# Altium PCB BRAINS.PcbDoc
Units mm, origin at the board's own origin, x right, y up, seen from the top; angles counter-clockwise.
Board outline 32.5 x 11 mm, 4 copper layers (Top Layer, Layer 1, Layer 2, Bottom Layer), stack 1.868 mm thick; 58 components, 45 nets, 199 pads, 134 vias.
Unrouted connection lines stored in the file: 7.
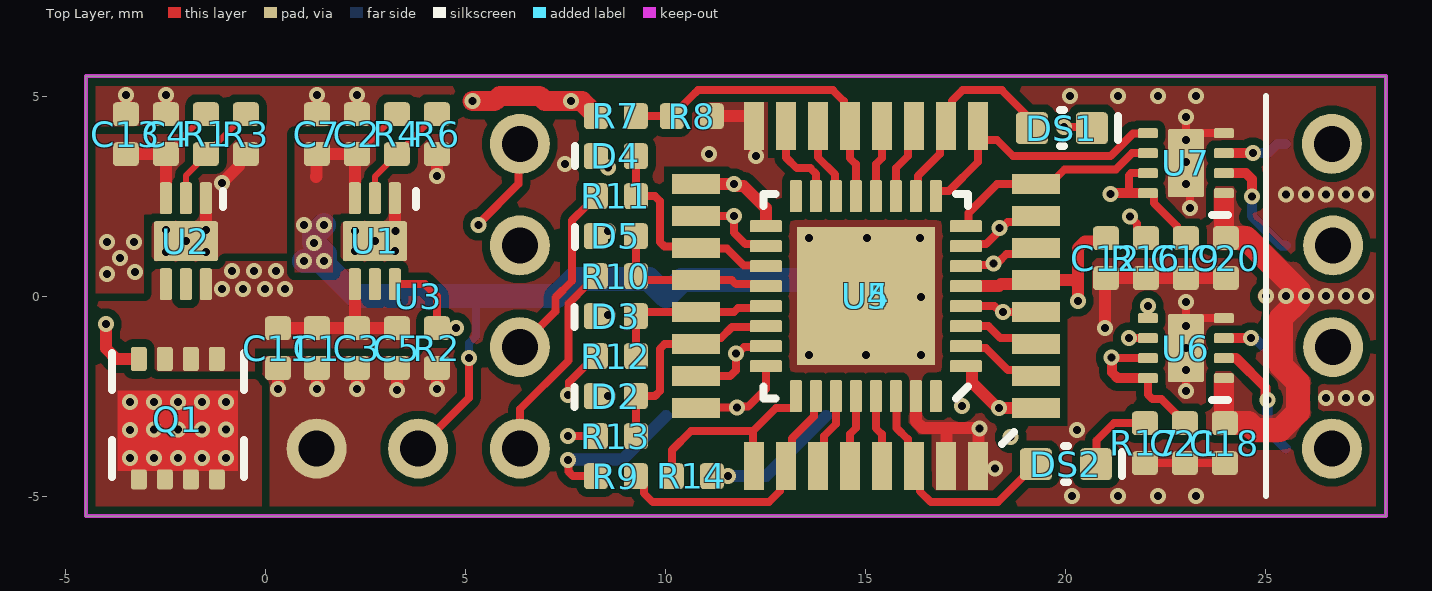
[diagram p0: Top Layer view]
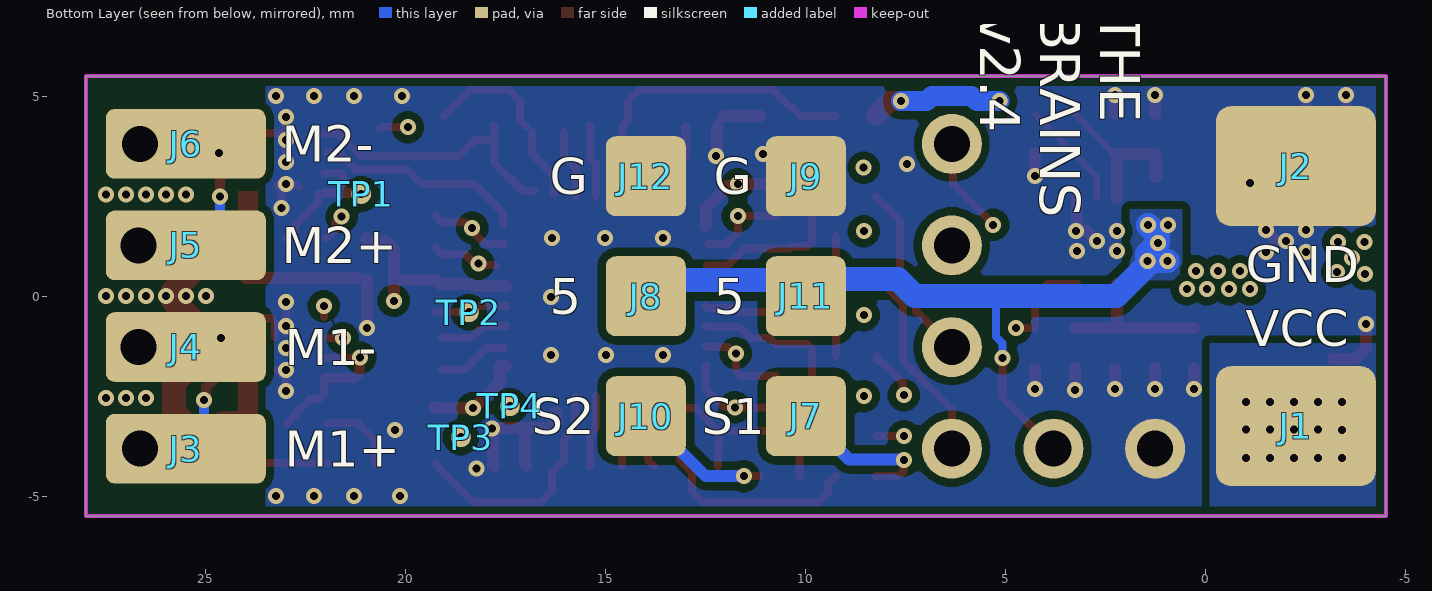
[diagram p1: Bottom Layer view, seen from below]
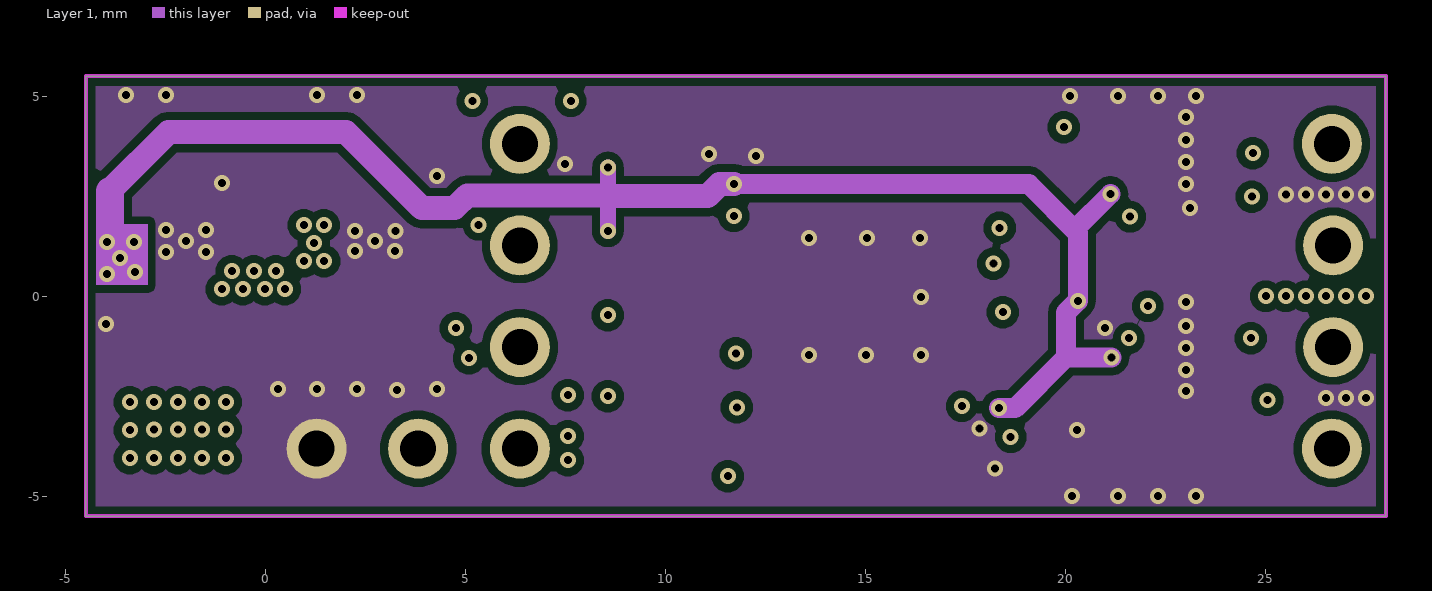
[diagram p2: Layer 1]
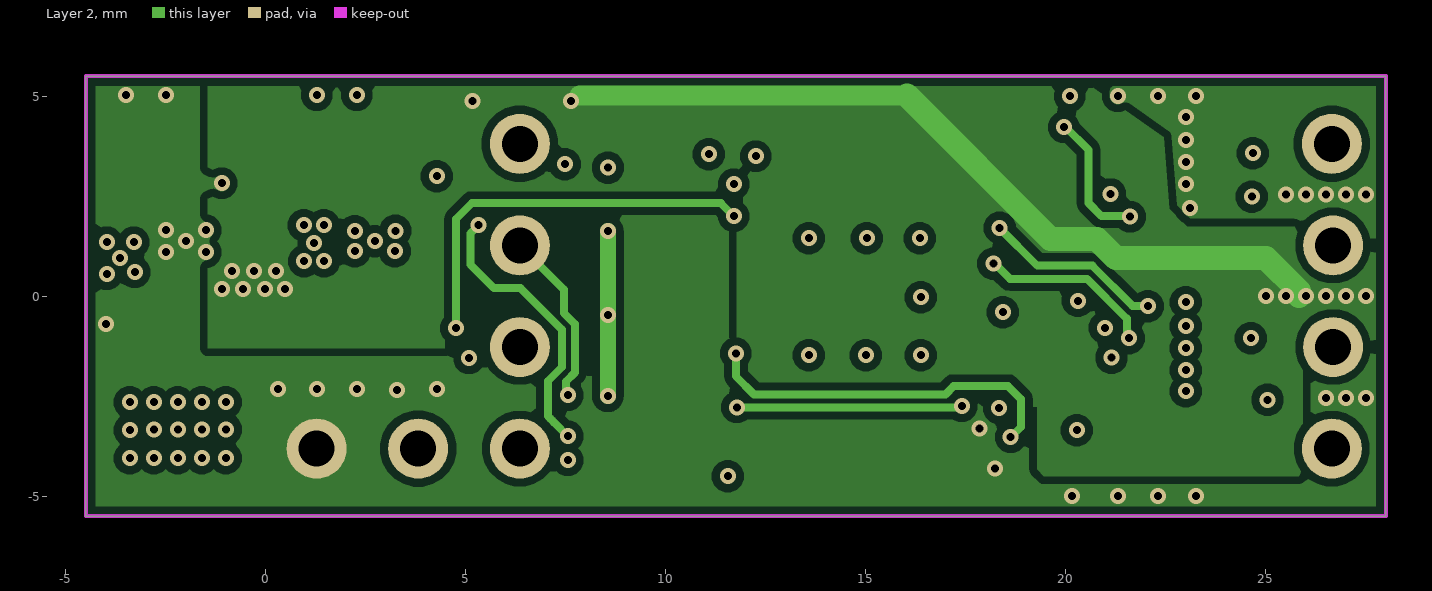
[diagram p3: Layer 2]
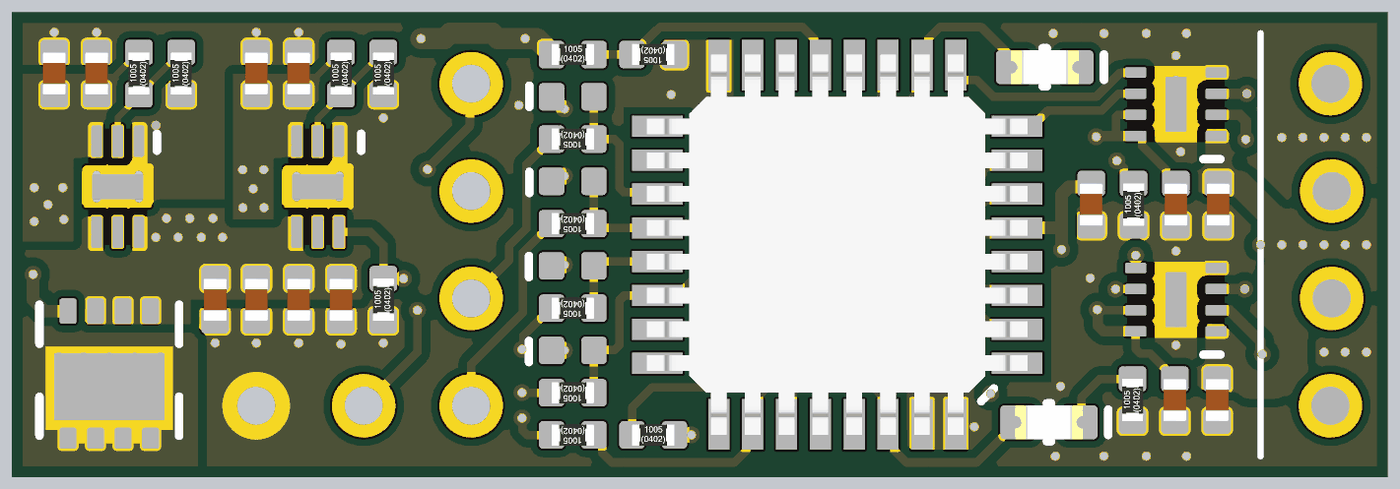
[diagram p4: 3D render of the assembled board from above, using the file's embedded part models]

## Layer stack, top to bottom
Top Solder: solder mask 0.0102, Solder Resist, Dk 3.5
Top Layer: signal copper 0.0356
Dielectric 1: core 0.1016, FR-4, Dk 4.5
Layer 1: signal copper 0.035
Dielectric1: core 1.524, FR-4, Dk 4.5
Layer 2: signal copper 0.035
Dielectric 2: core 0.1016, FR-4, Dk 4.5
Bottom Layer: signal copper 0.0356
Bottom Solder: solder mask 0.0102, Solder Resist, Dk 3.5

## Board outline
-4.5,-5.5 28,-5.5 28,5.5 -4.5,5.5

## Design rules (kind name [scope] priority, off if disabled: settings)
AcuteAngle [All] p1: minimum=6.00000000000000E+0001 checktracksonly=TRUE
AssemblyTestPointUsage [All] p1: valid=2
AssemblyTestpoint [All] p1: testpointundercomponent=FALSE minsize=1 maxsize=2.5 preferedsize=1.5 minholesize=0 maxholesize=1 preferedholesize=0.8 testpointgrid=0.1 usegrid=TRUE gridoriginx=100 gridoriginy=80 gridtolerance=0 allowsidebottom=TRUE minspacing=3
Clearance [All] p1: gap=0.199 ignorepadtopadclearanceinfootprint=FALSE except(0: Arc-Hole Track-Hole SMDPad-Hole THPad-Hole Via-Hole Fill-Hole Poly-Hole Region-Hole Text-Hole; 0.127: Arc-Arc Arc-Track Track-Track SMDPad-SMDPad; 0.15: Arc-Text Track-Text SMDPad-Text THPad-Text Via-Text Fill-Text Poly-Text Region-Text Text-Text)
ComponentClearance [All] p1: gap=0.25 collisioncheckmode=3 verticalgap=0.25 showdistances=TRUE
DiffPairsRouting [All] p1: maxlimit=10 minlimit=0.2 mostfreqgap=0.254 toplayer_prefgap=0.2 toplayer_minwidth=0.381 toplayer_maxwidth=0.381 toplayer_prefwidth=0.381 midlayer1_mingap=0.254 midlayer1_maxgap=0.254 midlayer1_minwidth=0.381 midlayer1_maxwidth=0.381 midlayer1_prefwidth=0.381 midlayer2_mingap=0.254 midlayer2_maxgap=0.254 midlayer2_minwidth=0.381 midlayer2_maxwidth=0.381 midlayer2_prefwidth=0.381 bottomlayer_prefgap=0.2 bottomlayer_minwidth=0.381 bottomlayer_maxwidth=0.381 bottomlayer_prefwidth=0.381 maxuncoupledlength=5
FabricationTestPointUsage TestPointUsage [All] p1: valid=0 allowmultiple=FALSE
FabricationTestpoint Testpoint [All] p1: side=1 testpointundercomponent=TRUE minsize=0.3 maxsize=10 preferedsize=1.5 minholesize=0 maxholesize=10 preferedholesize=0.8 testpointgrid=0.025 allowsidetop=TRUE usegrid=FALSE gridtolerance=0
Height [All] p1: minheight=0 maxheight=100 prefheight=5
HoleSize HoleSize_1 [All] p1: absolutevalues=TRUE maxlimit=6.3 minlimit=0.2 maxpercent=80.000 minpercent=20.000
HoleToHoleClearance [IsVia] p1: gap=0.254 allowstackedmicrovias=TRUE
HoleToHoleClearance HoleToHoleClearance_1 [All] p2: gap=0.5 allowstackedmicrovias=TRUE
MatchedLengths DiffPair_GTMatchedLengths [InDifferentialPair ('GT_RX0') Or InDifferentialPair ('GT_RX1') Or InDifferentialPair ('GT_TX2') Or InDifferentialPair ('GT_TX3') Or InDifferentialPair ('GT_TX1') Or InDifferentialPair ('GT_RX2') Or InDifferentialPair ('GT_TX0') Or InDifferentialPair ('GT_RX3')] p1: tolerance=0.127 checknetsindiffpair=TRUE checkdiffpairvsdiffpair=FALSE checkxsignals=FALSE checkothers=FALSE
MinimumAnnularRing [All] p1: minimumring=0.1
MinimumSolderMaskSliver [All] p1: minsoldermaskwidth=0.15
PlaneClearance [All] p1: clearance=0.3
PlaneConnect PlaneConnect_Via [isVia] p1: planeconnectstyle=Direct reliefexpansion=0.508 reliefentries=4 reliefconductorwidth=0.254 reliefairgap=0.254
PlaneConnect [All] p2: planeconnectstyle=Direct reliefexpansion=0.3 reliefentries=4 reliefconductorwidth=0.3 reliefairgap=0.2
PolygonConnect PolygonConnect_Via [isVia] p1: connectstyle=Direct reliefconductorwidth=0.254 reliefentries=4 polygonreliefangle="90 Angle" airgapwidth=0.254
PolygonConnect [All] p2: connectstyle=Direct reliefconductorwidth=0.3 reliefentries=4 polygonreliefangle="90 Angle" airgapwidth=0.254
RoutingLayers [All] p1: top layer_v5=TRUE mid layer 1_v5=FALSE mid layer 2_v5=FALSE bottom layer_v5=TRUE
RoutingVias [All] p1: holewidth=0.3 width=0.7 viastyle="Through Hole" minholewidth=0.2 minwidth=0.4 maxholewidth=0.3 maxwidth=0.7
SilkToSilkClearance [All] p1: silktosilkclearance=0.1
SilkToSolderMaskClearance SilkscreenOverComponentPads [IsPad] p1: minsilkscreentomaskgap=0.125 clearancetoexposedcopper=TRUE
SolderMaskExpansion SolderMaskExpansion_Via [isvia] p1: expansion=-10 istentingtop=FALSE
SolderMaskExpansion [All] p2: expansion=0.05 istentingtop=FALSE
Width [All] p1: maxlimit=100 minlimit=0.127 preferedwidth=0.15 minimp=50.000000 maximp=50.000000 favimp=50.000000
15 further rules are at their usual default settings.

## Components (designator, comment, footprint, x,y, rotation, side; value= is the part's Value field where it differs from the comment)
C1 "1uF,50V" CAPC1005X05N_0402 1.275,-1.3 r90 top
C2 "4.7uF,16V" CAPC1005X05N_0402 2.275,4.05 r270 top
C3 "1uF,50V" CAPC1005X05N_0402 2.275,-1.3 r90 top
C4 "4.7uF,16V" CAPC1005X05N_0402 -2.5,4.05 r270 top
C5 "100nF,50V" CAPC1005X05N_0402 3.275,-1.3 r90 top
C7 "100nF,50V" CAPC1005X05N_0402 1.275,4.05 r270 top
C11 "100nF,50V" CAPC1005X05N_0402 0.3,-1.3 r90 top
C12 "100nF,50V" CAPC1005X05N_0402 21,0.95 r90 top
C13 "100nF,50V" CAPC1005X05N_0402 -3.5,4.05 r270 top
C18 "100nF,50V" CAPC1005X05N_0402 23.975,-3.675 r90 top
C19 "100nF,50V" CAPC1005X05N_0402 23,0.95 r90 top
C20 "100nF,50V" CAPC1005X05N_0402 24,0.95 r90 top
C21 "100nF,50V" CAPC1005X05N_0402 22.975,-3.675 r90 top
D2 "SBR0240LPW" TVS0402 8.75,-2.5 r0 top
D3 "SBR0240LPW" TVS0402 8.75,-0.5 r0 top
D4 "SBR0240LPW" TVS0402 8.75,3.5 r0 top
D5 "SBR0240LPW" TVS0402 8.75,1.5 r0 top
DS1 "SML-LX0603IW-TR" LED_SML-LX0603 19.9,4.2 r180 top locked
DS2 "SML-LX0603GW-TR" LED_SML-LX0603 20,-4.2 r180 top locked
J1 "MountingPad(2x2)" MountingPad(2x2)#1 -2.25,-3.25 r0 bottom
J2 "MountingPad(2x2)" MountingPad(2x2)#1 -2.25,3.25 r0 bottom
J3 "MountingPad(2x2)" MountingPad(2x2)#2 25.5,-3.81 r180 bottom
J4 "MountingPad(2x2)" MountingPad(2x2)#2 25.5,-1.27 r180 bottom
J5 "MountingPad(2x2)" MountingPad(2x2)#2 25.5,1.27 r180 bottom
J6 "MountingPad(2x2)" MountingPad(2x2)#2 25.5,3.81 r180 bottom
J7 "MountingPad(2x2)" MountingPad(2x2)#3 10,-3 r180 bottom
J8 "MountingPad(2x2)" MountingPad(2x2)#3 14,0 r180 bottom
J9 "MountingPad(2x2)" MountingPad(2x2)#3 10,3 r180 bottom
J10 "MountingPad(2x2)" MountingPad(2x2)#3 14,-3 r180 bottom
J11 "MountingPad(2x2)" MountingPad(2x2)#3 10,0 r180 bottom
J12 "MountingPad(2x2)" MountingPad(2x2)#3 14,3 r180 bottom
Q1 "RQ3E120ATTB" ROHM-HSMT8 -2.2,-2.968 r270 top
R1 "270K,1%" RESC1005X04N_0402 -1.5,4.05 r90 top
R2 "10K,1%" RESC1005X04N_0402 4.275,-1.3 r90 top
R3 "150K,1%" RESC1005X04N_0402 -0.5,4.05 r90 top
R4 "270K,1%" RESC1005X04N_0402 3.275,4.05 r90 top
R6 "82K, 1%" RESC1005X04N_0402 4.275,4.05 r90 top
R7 "10K,1%" RESC1005X04N_0402 8.75,4.5 r0 top
R8 "1k8,1%" RESC1005X04N_0402 10.65,4.5 r180 top
R9 "10K,1%" RESC1005X04N_0402 8.75,-4.5 r180 top
R10 "10K,1%" RESC1005X04N_0402 8.75,0.5 r180 top
R11 "10K,1%" RESC1005X04N_0402 8.75,2.5 r180 top
R12 "10K,1%" RESC1005X04N_0402 8.75,-1.5 r180 top
R13 "10K,1%" RESC1005X04N_0402 8.75,-3.5 r180 top
R14 "10K,1%" RESC1005X04N_0402 10.65,-4.5 r0 top
R16 "120R,1%" RESC1005X04N_0402 22,0.95 r90 top
R17 "120R,1%" RESC1005X04N_0402 21.975,-3.675 r90 top
TP1 "TP_SMT" TP_050 21.116,2.555 r90 bottom
TP2 "TP_SMT" TP_050 18.425,-0.4 r270 bottom
TP3 "TP_SMT" TP_050 18.625,-3.525 r0 bottom
TP4 "TP_SMT" TP_050 17.4,-2.75 r270 bottom
U1 "LDL212" DFN50P200X200X80-8N_PWSON6 2.725,1.375 r270 top
U2 "LDL212" DFN50P200X200X80-8N_PWSON6 -2,1.375 r270 top
U3 "FS2A" FS2A 0,5.5 r0 top locked
U4 "STM32L051K8U6" QFN50P500X500X100-32N_32QFN_2 15,0 r180 top locked
U5 "STM32L051K8T6" LQFP32 15,0 r180 top locked
U6 "DRV8837C" DFN50P200X200X80-8N 23,-1.3 r180 top
U7 "DRV8837C" DFN50P200X200X80-8N 23,3.325 r180 top

## Footprints (in the part's own frame and the unit in brackets; to place one, negate y for a bottom-side part, rotate by r counter-clockwise, add the part's x,y. Pads: shape width x height; smd on the part's side, far side on the other; paste and mask are expansions set on the pad)
CAPC1005X05N_0402 [mm] "Chip Capacitor, 2-Leads, Body 1.0x0.5mm, IPC Medium Density"
  rrect33% 0.6x0.65 smd mask+0.05: 1(-0.5,0) 2(0.5,0)
  body extent -0.5,-0.28 0.5,0.27, height 0.5
DFN50P200X200X80-8N [mm] "DFN, 8-Leads, Body 2.1x2.1mm (max), Pitch 0.50mm, IPC Medium Density"
  rrect33% 0.5x0.25 smd: 1(-0.95,0.75) 2(-0.95,0.25) 3(-0.95,-0.25) 4(-0.95,-0.75) 5(0.95,-0.75) 6(0.95,-0.25) 7(0.95,0.25) 8(0.95,0.75)
  rrect9% 0.9x1.7 smd paste-0.2: 9(0,0)
  silkscreen extent -1.05,1.3 -0.65,1.3, body extent -1.05,-1.05 1.05,1.05, height 0.8
DFN50P200X200X80-8N_PWSON6 [mm] "DFN, 6-Leads, Body 2.1x2.1mm (max), Pitch 0.65mm, IPC Medium Density"
  rrect33% 0.8x0.3 smd paste-0.025: 1(-1.075,0.5) 2(-1.075,0) 3(-1.075,-0.5) 4(1.075,-0.5) 5(1.075,0) 6(1.075,0.5)
  rrect10% 1x1.6 smd paste-0.2: 7(0,0)
  silkscreen extent -1.25,1.02 -0.85,1.02, body extent -1.05,-1.05 1.05,1.05, height 0.8
FS2A [mm]
  round 1.5 hole 0.9: 1(1.27,-9.31) 5(3.81,-9.31) 9(6.35,-9.31) 10(6.35,-6.77) 11(6.35,-4.23) 12(6.35,-1.69)
LED_SML-LX0603 [mm] "Chip led, 2-Leads, Body 1.6x0.8mm, IPC Medium Density"
  rrect25% 0.8x0.8 smd: 1(-0.75,0) 2(0.75,0)
  silkscreen extent -1.4,-0.45 0.05,0.45, body extent -0.8,-0.4 0.8,0.4, height 0.63
LQFP32 [mm] "Low Profile Quad Flat Pack"
  rect 1.2x0.5 smd: 1(-4.25,2.8) 2(-4.25,2) 3(-4.25,1.2) 4(-4.25,0.4) 5(-4.25,-0.4) 6(-4.25,-1.2) 7(-4.25,-2) 8(-4.25,-2.8) 17(4.25,-2.8) 18(4.25,-2) 19(4.25,-1.2) 20(4.25,-0.4) 21(4.25,0.4) 22(4.25,1.2) 23(4.25,2) 24(4.25,2.8)
  rect 0.5x1.2 smd: 9(-2.8,-4.25) 10(-2,-4.25) 11(-1.2,-4.25) 12(-0.4,-4.25) 13(0.4,-4.25) 14(1.2,-4.25) 15(2,-4.25) 16(2.8,-4.25) 25(2.8,4.25) 26(2,4.25) 27(1.2,4.25) 28(0.4,4.25) 29(-0.4,4.25) 30(-1.2,4.25) 31(-2,4.25) 32(-2.8,4.25)
  silkscreen extent -3.7,3.4 -3.4,3.7, body extent -4.5,-4.5 4.5,4.5, height 1.63
MountingPad(2x2)#1 [mm]
  rrect25% 4x3 smd: 1(0,0)
MountingPad(2x2)#2 [mm]
  rrect25% 4x1.74 smd: 1(0,0)
MountingPad(2x2)#3 [mm]
  rrect25% 2x2 smd: 1(0,0)
QFN50P500X500X100-32N_32QFN_2 [mm] "QFN, 32-Leads, Body 5.1x5.1mm (max), Pitch 0.50mm, IPC Medium Density"
  rrect20% 0.8x0.3 smd mask+0.05: 1(-2.5,1.75) 2(-2.5,1.25) 3(-2.5,0.75) 4(-2.5,0.25) 5(-2.5,-0.25) 6(-2.5,-0.75) 7(-2.5,-1.25) 8(-2.5,-1.75) 17(2.5,-1.75) 18(2.5,-1.25) 19(2.5,-0.75) 20(2.5,-0.25) 21(2.5,0.25) 22(2.5,0.75) 23(2.5,1.25) 24(2.5,1.75)
  rrect20% 0.3x0.8 smd mask+0.05: 9(-1.75,-2.5) 10(-1.25,-2.5) 11(-0.75,-2.5) 12(-0.25,-2.5) 13(0.25,-2.5) 14(0.75,-2.5) 15(1.25,-2.5) 16(1.75,-2.5) 25(1.75,2.5) 26(1.25,2.5) 27(0.75,2.5) 28(0.25,2.5) 29(-0.25,2.5) 30(-0.75,2.5) 31(-1.25,2.5) 32(-1.75,2.5)
  rect 3.45x3.45 smd paste-0.8 mask+0.05: 33(0,0)
  silkscreen extent -2.55,-2.56 2.56,2.56, body extent -2.55,-2.55 2.55,2.55, height 1
RESC1005X04N_0402 [mm] "Chip Resistor, 2-Leads, Body 1.0x0.5mm, IPC Medium Density"
  rrect33% 0.6x0.65 smd mask+0.05: 1(-0.5,0) 2(0.5,0)
  body extent -0.5,-0.25 0.5,0.25, height 0.35
ROHM-HSMT8 [mm] "MOSFET N CH 60V 34.5A 8DFN"
  rrect29% 0.6x0.4 smd mask+0.05: 1(-1.4,0.975) 2(-1.4,0.325) 3(-1.4,-0.325) 4(-1.4,-0.975)
  rrect29% 0.5x0.4 smd mask+0.05: 5(1.61,-0.975) 6(1.61,-0.325) 7(1.61,0.325) 8(1.61,0.975)
  Top Layer region: 1.4,1.19 1.4,0.76 1.4,0.54 1.4,0.11 1.4,-0.11 1.4,-0.54 1.4,-0.76 1.4,-1.19 1.4,-1.5 -0.6,-1.5 -0.6,1.5 1.4,1.5
  silkscreen extent -1.55,-1.65 1.55,1.65, body extent -1.5,-1.65 1.5,1.65, height 0.9
TP_050 [mm]
  round 0.5 smd paste-5 mask-0.05: 1(0,0)
TVS0402 [mm] "Molded Diode SMB Bi-directional, 2-Leads, Body 5.3x3.6mm, IPC Medium Density"
  rrect33% 0.6x0.65 smd: 1(-0.5,0) 2(0.5,0)
  body extent -0.6,-0.3 0.6,0.3, height 0.6

## Part data
C1 C3: library part CCG-106DH-H, "CAP CER 1UF 50V X5R 0402", Capacitance=1uF, Dielectric=X5R, Manufacturer="Taiyo Yuden", Manufacturer Part Number=UMK105CBJ105MV-F, Supplier Part Number 1=587-6278-1-ND, Tolerance=20%, Voltage=50V, BWA PN=CCG-106DH-H, Display_Name=1uF,50V, Schematic Symbol=CAP-NP_1, Supplier 1=Digi-Key, Type=Ceramic
C2 C4: library part CCG-476DE-H, "CAP CER 4.7UF 16V X5R 0402", Capacitance=4.7uF, Dielectric=X5R, Manufacturer="AVX Corporation", Manufacturer Part Number=0402YD475MAT2A, Supplier Part Number 1=478-10788-1-ND, Tolerance=20%, Voltage=16V, BWA PN=CCG-476DE-H, Display_Name=4.7uF,16V, Schematic Symbol=CAP-NP_1, Supplier 1=Digi-Key, Type=Ceramic
C5 C7 C11 C12 C13 C18 C19 C20 C21: library part CCG-104CE-G, "CAP CER 100nF 50V X7R 0402", Capacitance=100nF, Dielectric=X7R, Manufacturer="Taiyo Yuden", Manufacturer Part Number=UMK105B7104KV-FR, Supplier Part Number 1=587-3498-1-ND, Tolerance=10%, Voltage=50V, BWA PN=CCG-104CE-G, Display_Name=100nF,50V, Schematic Symbol=CAP-NP_1, Supplier 1=Digi-Key, Type=Ceramic
D2 D3 D4 D5: library part DIO-10207-A, "SBR DIODE X1-DFN1006-2/SWP", Manufacturer="Diodes Incorporated", Manufacturer Part Number=SBR0240LPW-7B, Supplier Part Number 1=SBR0240LPW-7BDICT-ND, BWA PN=DIO-10207-A, d_if(max)=200mA, Display_Name=SBR0240LPW, Schematic Symbol=DIODE_1, Supplier 1=Digi-Key, Type=Standard, Vf@I="290mV @10mA", Vr(max)=40V
DS1: library part LED-10056-A, "LED 635NM RED DIFF 0603 SMD", Colour=Red, Manufacturer="Lumex Opto/Components Inc", Supplier Part Number 1=67-1548-1-ND, Axial Intensity=14mcd, BWA PN=LED-10056-A, Display_Name=SML-LX0603IW-TR, If(max)=20mA, Lens Style/Size="Rectangle, 1mmx0.8mm", Lens type="Diffused, White", Manufacturer Part Number=SML-LX0603IW-TR, Schematic Symbol=LED_1, Supplier 1=Digi-Key, Vf@I=2V, Viewing Angle=160deg, Vr(max)=5V, Wavelength=635nm
DS2: library part LED-10011-A, "LED 565NM GRN DIFF 0603 SMD", Colour=Green, Manufacturer="Lumex Opto/Components Inc", Supplier Part Number 1=67-1549-1-ND, Axial Intensity=18mcd, BWA PN=LED-10011-A, Display_Name=SML-LX0603GW-TR, If(max)=25mA, Lens Style/Size="Rectangle, 1mmx0.8mm", Lens type="Diffused, White", Manufacturer Part Number=SML-LX0603GW-TR, Schematic Symbol=LED_1, Supplier 1=Digi-Key, Vf@I=2.2V, Viewing Angle=160deg, Vr(max)=5V, Wavelength=565nm
Q1: library part TRN-10125-A, "MOSFET P-CH 30V 12A 8HSMT", Manufacturer="Rohm Semiconductor", Supplier Part Number 1=RQ3E120ATTBCT-ND, BWA PN=TRN-10125-A, Display_Name=RQ3E120ATTB, Id(max)="12A (Ta)", Manufacturer Part Number=RQ3E120ATTB, rds(on)="8mOhm @ 12A, 10V", Schematic Symbol=MOSFET-P_5, Supplier 1=Digi-Key, Type=P, Vds(max)=30V, Vgs(max)="±20V / ±20V / ±20V", Vth(max)="2.5V @ 1mA"
R1 R4: library part RSG-270K0-D, "RES SMD 270K OHM 1% 1/16W 0402", Manufacturer=Yageo, Manufacturer Part Number=RC0402FR-07270KL, Power=0.063W, Resistance=270K, Supplier Part Number 1=311-270KLRCT-ND, Tolerance=1%, BWA PN=RSG-270K0-D, Display_Name=270K,1%, Schematic Symbol=RESISTOR_1, Supplier 1=Digi-Key, Type=Chip
R2 R7 R9 R10 R11 R12 R13 R14: library part RSG-10K00-D, "RES 10K OHM 1/16W 1% 0402 SMD", Manufacturer=Yageo, Manufacturer Part Number=RC0402FR-0710KL, Power=0.0625W, Resistance=10K, Supplier Part Number 1=311-10.0KLRCT-ND, Tolerance=1%, BWA PN=RSG-10K00-D, Display_Name=10K,1%, Schematic Symbol=RESISTOR_1, Supplier 1=Digi-Key, Type=Chip
R3: library part RSG-150K0-D, "RES SMD 150K OHM 1% 1/16W 0402", Manufacturer=Yageo, Manufacturer Part Number=RC0402FR-07150KL, Power=0.063W, Resistance=150K, Supplier Part Number 1=311-150KLRCT-ND, Tolerance=1%, BWA PN=RSG-150K0-D, Display_Name=150K,1%, Schematic Symbol=RESISTOR_1, Supplier 1=Digi-Key, Type=Chip
R6: library part RSG-82K00-D, "RES SMD 82K OHM 1% 1/16W 0402", Manufacturer=YAGEO, Manufacturer Part Number=RC0402FR-0782KL, Power=0.063W, Resistance=82K, Supplier Part Number 1=311-82.0KLRCT-ND, Tolerance=1%, BWA PN=RSG-82K00-D, Display_Name="82K, 1%", Schematic Symbol=RESISTOR_1, Supplier 1=Digi-Key, Type=Chip
R8: library part RSG-1K800-D, "RES 1k8 0.0625W 1% 0402 SMD", Manufacturer="Vishay Dale", Manufacturer Part Number=CRCW04021K80FKED, Power=0.0625W, Resistance=1k8, Supplier Part Number 1=541-1.80KLCT-ND, Tolerance=1%, BWA PN=RSG-1K800-D, Display_Name=1k8,1%, Schematic Symbol=RESISTOR_1, Supplier 1=Digi-Key, Type=Chip
R16 R17: library part RSG-120R0-D, "RES 120 OHM 1/16W 0402 SMD", Manufacturer=Yageo, Manufacturer Part Number=RC0402FR-07120RL, Power=0.0625W, Resistance=120R, Supplier Part Number 1=311-120LRCT-ND, Tolerance=1%, BWA PN=RSG-120R0-D, Display_Name=120R,1%, Schematic Symbol=RESISTOR_1, Supplier 1=Digi-Key, Type=Chip
TP1 TP2 TP3 TP4: library part NONPART-002, "Test Point - SMT", BWA PN=NONPART-002, Display_Name=TP_SMT, Schematic Symbol=TP_1
U1 U2: library part ICT-10910-A, "IC REG LINEAR 5V 1.2A 6DFN", Manufacturer=STMicroelectronics, Manufacturer Part Number=LDL212PU50R, Supplier Part Number 1=497-16897-1-ND, Temp Range="-40°C ~ 125°C (TJ)", BWA PN=ICT-10910-A, Display_Name=LDL212, Schematic Symbol=LDL212PU50R, Supplier 1=Digi-Key
U4: library part ICT-10734-A, "IC MCU 32BIT 64KB FLASH 32UFQFPN", Manufacturer=STMicroelectronics, Supplier Part Number 1=497-17490-ND, Temp Range="-40°C ~ 85°C", BWA PN=ICT-10734-A, Display_Name=STM32L051K8U6, Manufacturer Part Number=STM32L051K8U6, Schematic Symbol=STM32L051x6/8U, Supplier 1=Digi-Key, Supplier 2=Mouser, Supplier Part Number 2=511-STM32L051K8U6
U5: library part ICT-10696-A, "32 Bit Mcirocontroler", Manufacturer="ST Microelectronics", Supplier Part Number 1=497-14901-ND, Temp Range="-40°C ~ 85°C", BWA PN=ICT-10696-A, Display_Name=STM32L051K8T6, Manufacturer Part Number=STM32L051K8T6, Schematic Symbol=STM32L051x6/8, Supplier 1=Digi-Key
U6 U7: library part ICT-10892-A, "IC HALF-BRIDGE DRVR PWM 8WSON", Manufacturer="Texas Instruments", Manufacturer Part Number=DRV8837CDSGR, Supplier Part Number 1=296-47205-1-ND, Temp Range="-40°C ~ 85°C", BWA PN=ICT-10892-A, Display_Name=DRV8837C, Schematic Symbol=DRV8837C, Supplier 1=Digi-Key

## Free pads (board coordinates)
  round 1.5 hole 0.9: 4(26.65,-3.81) 4(26.65,3.81) 4(26.68,-1.27) 4(26.68,1.27)

## Via types
v1: diameter 0.4, hole 0.2, Top Layer to Bottom Layer, tented both sides, 134 vias

## Nets (pads, with @x,y where several pads share a name; then routed paths per layer and width w, separated by ;. In a path a pad name is that pad's centre, name@x,y a point inside that pad or via, vN(x,y) a via of type N, cw(c..) or ccw(c..) an arc to the next point about the centre after c; other vN are vias at no path point)
+3V3: C4.2 C12.2 C13.2 C19.2 C21.2 D2.1 D3.1 D4.1 D5.1 R1.2 TP1.1 U2.3 U4.1 U4.5 U4.17 U5.1 U5.5 U5.17 U6.7 U6.8 U7.7 U7.8 | length 62.4
  Top Layer w0.15: C4.2 -2.488,3.55 -2.25,3.788 -2.25,3.8 -1.75,4.3 -1.75,4.312 -1.512,4.55 R1.2
  Top Layer w0.2: v1(21.142,-1.533) 21.159,-1.55 U6.7 ; 21.593,2.575 21.582,2.586 21.582,3.022 21.636,3.075 U7.7 ; U6.8 22.05,-2.458 22.167,-2.575 22.391,-2.575 22.75,-2.934 22.75,-2.975 22.95,-3.175 C21.2 ; U7.8@22.138,2.55 22.2,2.55 22.2,2.333 22.775,1.758 22.775,1.65 22.975,1.45 C19.2
  Top Layer w0.25: v1(21.116,2.555) v1@21.121,2.555 ; v1@21.136,2.575 21.593,2.575 U7.8 ; v1(21.142,-1.533) 21.153,-1.544 21.153,-1.906 21.296,-2.05 U6.8@22.025,-2.05
  Top Layer w0.3: C13.2 C4.2 U2.3 ; U5.17 v1(11.7,2.8) 11.738,2.762 11.94,2.762 12.501,2.201 U4.17@12.501,1.75 ; U4.1 17.659,-1.75 17.659,-2.16 18.299,-2.8 U5.1@19.15,-2.8 ; U4.5 18.327,0.25 18.377,0.3 18.624,0.3 19.15,0.3 U5.5 20.2,0.4 20.3,0.3 ; U5.1 U5.1@19.281,-2.769 ; v1(20.299,-0.114) v1(20.299,-0.114) 20.3,0.3 ; C12.2 20.921,1.371 20.476,1.371 20.3,1.195 20.3,0.3
  Layer 1 w0.4: v1(8.55,1.625) 8.55,2.5 8.55,3.211 v1(8.554,3.214)
  Layer 1 w0.5: v1(11.7,2.8) 19.077,2.8 20.3,1.577 v1@20.3,-0.075 ; v1(18.325,-2.8) 18.733,-2.8 20,-1.533 ; 20.219,1.658 v1(21.116,2.555) ; v1(20.299,-0.114) 20,-0.412 20,-1.533 ; v1(21.142,-1.533) 20,-1.533
  Layer 1 w0.6: -3.901,2.637 -2.437,4.1 2,4.1 3.899,2.201 4.718,2.201 5.037,2.52 8.55,2.52 ; v1@-3.65,0.975 -3.3,1.325 v1(-3.3,1.351) ; 8.55,2.5 11.04,2.5 11.34,2.8 v1(11.7,2.8)
  Layer 1 w0.7: -3.901,1.8 -3.901,2.637 ; v1@-3.895,1.351 -3.65,1.106 v1(-3.65,0.95) v1@-3.65,0.975
  Layer 2 w0.4: v1(8.55,-2.5) v1(8.55,1.625)
  other v1: 8.55,-0.475 -3.975,0.55 -3.275,0.6 -3.973,1.351
+5V: C2.2 C7.2 J8.1 J11.1 R4.2 U1.3 U3.5 | length 23.8
  Top Layer w0.15: C2.2@2.225,3.5 C2.2 2.287,3.55 2.525,3.788 2.525,3.8 3.025,4.3 3.025,4.312 3.263,4.55 R4.2
  Top Layer w0.2: U3.5 5.08,-2.54 v1(5.08,-1.55)
  Top Layer w0.3: 1.25,3 1.25,2.975 1.263,2.988 1.263,3.538 C7.2 C2.2 ; U1.3 C2.2@2.225,3.5
  Bottom Layer w0.2: v1(5.08,-1.55) 5.083,-1.547 5.083,-1.175 5.25,-1.007 5.25,-0.12 5.23,-0.1 5.23,0
  Bottom Layer w0.6: v1(0.956,0.875) v1@1.475,0.875 ; v1(1.45,1.775) 1.2,1.525 v1(1.2,1.325) 1.475,1.05 v1@1.475,0.875 ; J8.1 13.6,0.4 10.4,0.4 J11.1 9.575,0.425 7.7,0.425 7.275,0 5.23,0 2.25,0 1.475,0.775 v1@1.475,0.875
  other v1: 1.456,0.875 0.95,1.775
BATT_DET: R7.2 R8.2 U4.13 U5.13 | length 8.1
  Top Layer w0.2: R7.2 R8.2 10.15,4.525 10.35,4.725 10.375,4.725 10.725,5.075 10.734,5.075 10.809,5.15 14.174,5.15 14.45,4.874 14.45,4.4 U5.13 14.6,3.45 14.75,3.3 U4.13
GND: C1.1 C2.1 C3.1 C4.1 C5.1 C7.1 C11.1 C12.1 C13.1 C18.1 C19.1 C20.1 C21.1 J2.1 J9.1 J12.1 Q1.4 R2.1 R3.1 R6.1 R8.1 R16.1 R17.1 U1.1 U1.7 U2.1 U2.7 U3.1 U4.31 U4.33 U5.16 U5.31 U5.32 U6.4 U6.9 U7.4 U7.9 | length 27.9
  Top Layer w0.2: U5.16@12.05,4.5 12.2,4.35 U5.16 ; R17.1 C21.1 C18.1 ; U7.9@22.678,2.728 U7.9@22.725,2.775 ; U7.9@22.725,3.975 22.9,3.975 23,4.075 v1(23,4.475) ; v1(23,-2.375) 23,-2.05 23.099,-1.951 23.101,-1.951 U6.9@23.206,-1.847 ; U6.9@23,-0.925 v1(23,-0.15) ; C19.1 C20.1@24.006,0.45 ; U7.9@23,3.6 U7.9@23,3.725 ; U7.9@23.05,4.075 U7.9@23.264,4.075 ; v1(23.11,2.2) 23.11,2.683 U7.9@23.206,2.778 ; U6.9@23.261,-0.666 23.275,-0.679 U6.9@23.275,-1.025 ; U6.9@23.35,-0.575 U6.9@23.4,-0.575 ; U6.9@23.35,-0.55 U6.4 ; U7.9@23.35,4.075 U7.4@23.975,4.075
  Top Layer w0.3: v1(-4,-0.7) -4,-1.304 -3.732,-1.572 -3.225,-1.572 -3.222,-1.568 Q1.4 ; C13.1@-3.5,4.575 v1(-3.5,5.025) ; C4.1@-2.5,4.575 v1(-2.5,5.025) ; v1(-2,1.375) -1.775,1.375 v1(-1.5,1.65) U2.1 ; v1(-1.1,2.825) -0.675,3.25 -0.675,3.4 R3.1@-0.5,3.575 ; v1(0.3,-2.325) C11.1 ; v1(1.275,-2.325) C1.1 ; C7.1 v1(1.275,5.025) ; v1(2.275,-2.325) C3.1@2.275,-1.825 ; C2.1 v1(2.275,5.025) ; v1(2.725,1.375) 2.986,1.636 v1(3.239,1.636) 3.225,1.65 U1.1 ; v1(3.275,-2.35) C5.1 ; v1(4.275,-2.325) R2.1@4.275,-1.825 ; v1(4.275,3) R6.1@4.275,3.575 ; R8.1 U5.16@12.05,4.5 ; U5.16 12.225,4.225 12.225,3.525 v1(12.25,3.5) ; U4.31@16.25,-2.9 16.25,-3.124 16.404,-3.279 ; 16.426,-3.3 17.835,-3.3 v1(17.843,-3.307) ; U5.31@16.983,-4.233 17.022,-4.193 17.022,-3.386 ; U5.32 17.821,-4.229 17.821,-3.329 v1@17.85,-3.3 ; v1(20.974,-0.789) C12.1@20.974,0.424 ; C12.1@21.2,0.45 R16.1 C19.1 ; C19.1 C20.1
  other v1: 20.15,-5 21.3,-5 22.3,-5 23.25,-5 18.235,-4.305 20.275,-3.35 26.5,-2.54 27,-2.54 27.5,-2.54 23,-1.85 13.575,-1.475 15,-1.475 16.375,-1.475 23,-1.3 23,-0.75 16.375,-0.025 -2.5,1.1 -1.5,1.1 2.225,1.125 3.225,1.125 13.575,1.45 15.025,1.45 16.35,1.45 2.225,1.625 -2.5,1.651 25.5,2.54 26,2.54 26.5,2.54 27,2.54 27.5,2.54 23,2.8 7.475,3.3 23,3.35 11.075,3.55 23,3.9 20.1,5 21.3,5 22.3,5 23.25,5
L_MOTOR+: J3.1 pad.4@26.65,-3.81 U6.2 | length 3.1
  Top Layer w0.25: U6.2 24.26,-1.55 24.994,-2.283 24.994,-2.542 v1(25.042,-2.59)
  Bottom Layer w0.25: v1(25.042,-2.59) 25.042,-3.352 J3.1
L_MOTOR-: J4.1 pad.4@26.68,-1.27 U6.3 | length 1.6
  Top Layer w0.25: U6.3 v1(24.626,-1.05)
  Bottom Layer w0.25: v1(24.626,-1.05) 24.729,-1.05 24.949,-1.27 J4.1
L_PWM1: U4.6 U5.6 U6.6 | length 6.5
  Top Layer w0.2: U4.6@17.75,0.75 17.783,0.783 18.155,0.783 v1(18.188,0.816) ; v1@18.162,0.8 18.217,0.855 18.317,0.855 18.512,1.05 19.1,1.05 U5.6 ; v1(21.575,-1.05) U6.6@21.946,-1.05
  Layer 2 w0.2: v1(18.188,0.816) 18.221,0.816 18.602,0.436 20.526,0.436 21.524,-0.562 21.524,-0.858 21.537,-0.87 21.537,-1.012 v1(21.575,-1.05)
L_PWM2: U4.7 U5.7 U6.5 | length 6.8
  Top Layer w0.2: U4.7@17.55,1.3 18.007,1.3 18.305,1.598 18.305,1.655 18.35,1.7 18.391,1.7 18.541,1.85 19.1,1.85 U5.7 ; U6.5@22.05,-0.525 v1(22.05,-0.25)
  Layer 2 w0.2: v1(18.343,1.707) 19.287,0.763 20.662,0.763 21.671,-0.246 22.046,-0.246 v1(22.05,-0.25)
LED_GRN: DS2.2 U4.30 U5.30 | length 6
  Top Layer w0.2: U4.30@15.766,-2.516 15.766,-3.291 16.05,-3.575 16.05,-4.1 U5.30 16.35,-4.4 16.35,-4.874 16.626,-5.15 18.3,-5.15 DS2.2
LED_RED: DS1.2 U4.10 U5.10 | length 4.8
  Top Layer w0.2: U4.10@16.3,2.55 16.3,3.007 16.85,3.557 U5.10@16.85,4.1 ; U5.10 17.15,4.4 17.15,4.883 17.417,5.15 18.4,5.15 DS1.2@19.05,4.5
MCU_S1: D5.2 R10.1 U4.20 U5.20 | length 4.4
  Top Layer w0.2: D5.2 R10.1 9.35,0.4 11.65,0.4 11.75,0.3 12.45,0.3 U4.20
MCU_S2: D4.2 R11.1 U4.19 U5.19 | length 5.5
  Top Layer w0.2: D4.2 R11.1 9.733,2.5 9.85,2.383 9.85,2.071 9.85,1.359 9.967,1.242 10.358,1.242 10.411,1.189 11.533,1.189 11.957,0.764 U4.19@12.47,0.764
MCU_S3: D3.2 R12.1 U4.21 U5.21 | length 4.2
  Top Layer w0.2: R12.1 D3.2 ; D3.2@9.35,-0.4 U5.21 11.7,-0.4 11.8,-0.3 12.45,-0.3 U4.21
MCU_S4: D2.2 R13.1 U4.22 U5.22 | length 5.6
  Top Layer w0.2: R13.1 D2.2 9.259,-2.491 9.733,-2.491 9.85,-2.374 9.85,-1.317 9.967,-1.2 U5.22 10.9,-1.05 11.374,-1.05 11.654,-0.77 12.48,-0.77 U4.22
NetDS1_1: DS1.1 R16.2 | length 4.8
  Top Layer w0.2: v1(19.95,4.225) 20.625,4.225 DS1.1 ; v1@21.59,2.003 v1(21.606,1.987) 21.775,1.818 21.775,1.65 21.975,1.45 R16.2
  Layer 2 w0.2: v1(19.95,4.225) 20,4.225 20.566,3.659 20.566,2.327 20.888,2.005 21.588,2.005 v1(21.606,1.987)
NetDS2_1: DS2.1 R17.2 | length 2
  Top Layer w0.2: DS2.1 20.773,-4.177 20.773,-3.602 21.2,-3.175 R17.2
NetJ1_1: J1.1 Q1.5 Q1.6 Q1.7 Q1.8
  other v1: -3.4,-4.05 -2.8,-4.05 -2.2,-4.05 -1.6,-4.05 -1,-4.05 -3.4,-3.35 -2.8,-3.335 -2.2,-3.335 -1.6,-3.335 -1,-3.335 -3.4,-2.65 -2.8,-2.65 -2.2,-2.65 -1.6,-2.65 -1,-2.65
NetJ7_1: J7.1 R9.2 | length 3.9
  Top Layer w0.2: v1(7.55,-4.1) 7.563,-4.113 7.563,-4.383 7.681,-4.5 R9.2
  Bottom Layer w0.3: v1(7.55,-4.1) 7.569,-4.081 8.919,-4.081 J7.1
NetJ10_1: J10.1 R14.2 | length 3.5
  Top Layer w0.2: R14.2 v1(11.55,-4.5)
  Bottom Layer w0.3: v1(11.55,-4.5) 12.5,-4.5 J10.1
NetR1_1: R1.1 R3.2 U2.2 | length 2.4
  Top Layer w0.15: U2.2@-2.001,2.475 -2.001,3.013 R1.1@-1.686,3.328 ; R1.1 -1.488,3.55 -1.25,3.788 -1.25,3.8 -0.75,4.3 -0.75,4.312 -0.512,4.55 R3.2
NetR4_1: R4.1 R6.2 U1.2 | length 2.8
  Top Layer w0.15: U1.2 2.725,2.988 3.04,3.303 3.04,3.327 3.263,3.55 R4.1 3.287,3.55 3.525,3.788 3.525,3.8 4.025,4.3 4.025,4.312 4.263,4.55 R6.2
NRST: TP2.1 U4.4 U5.4 | length 1.8
  Top Layer w0.2: U4.4 18.221,-0.25 18.371,-0.4 v1(18.425,-0.4) U5.4
OP_S1: R9.1 U4.26 U5.26 | length 6.9
  Top Layer w0.2: R9.1 9.45,-4.7 9.45,-4.925 9.675,-5.15 12.574,-5.15 12.85,-4.874 12.85,-4.4 U5.26 13.15,-4.1 13.15,-3.557 13.7,-3.007 13.7,-2.55 U4.26
OP_S4: R14.1 U4.25 U5.25 | length 5.3
  Top Layer w0.2: R14.1 10.158,-4.492 10.158,-3.842 10.625,-3.375 12.175,-3.375 ; U5.25@12.175,-3.767 12.175,-3.375 ; U5.25 U5.25@12.2,-3.767 ; U4.25 13.25,-2.75 13.2,-2.8 12.75,-2.8 12.175,-3.375
PS_EN: R2.2 U1.6 U4.18 U5.18 | length 14.7
  Top Layer w0.2: U1.6 3.975,0.3 4.275,0 R2.2 v1(4.75,-0.8) ; U5.18 v1(11.7,2) 11.7,1.593 11.993,1.3 U4.18@12.45,1.3
  Layer 2 w0.2: v1(4.75,-0.8) 4.75,1.925 5.15,2.325 11.375,2.325 v1(11.7,2)
R_MOTOR+: J5.1 pad.4@26.68,1.27 U7.2 | length 2.8
  Top Layer w0.25: U7.2 24.504,3.075 24.65,2.929 v1(24.65,2.49)
  Bottom Layer w0.25: v1(24.65,2.49) 24.65,2.008 25.388,1.27 J5.1
R_MOTOR-: J6.1 pad.4@26.65,3.81 U7.3 | length 1.7
  Top Layer w0.25: U7.3@23.89,3.575 v1(24.675,3.575)
  Bottom Layer w0.25: v1(24.675,3.575) 25.058,3.575 25.293,3.81 J6.1
R_PWM1: U4.8 U5.8 U7.6 | length 5.3
  Top Layer w0.2: U4.8@17.566,1.8 17.566,2.083 18.283,2.8 U5.8 19.6,2.8 19.973,3.173 21.251,3.173 21.653,3.575 U7.6@21.946,3.575
R_PWM2: U4.9 U5.9 U7.5 | length 6.9
  Top Layer w0.2: U4.9@16.8,2.633 17.083,2.633 17.8,3.35 U5.9@17.8,3.9 ; U5.9 U5.9@17.8,3.9 ; U7.5 22.042,4.067 21.683,4.067 21.116,3.5 18.684,3.5 18.285,3.9 U5.9@17.8,3.9
RADIO_S1: R10.2 U3.9 | length 5.6
  Top Layer w0.2: U3.9@5.825,-3.81 U3.9 6.35,-2.825 7.571,-1.604 7.571,-0.179 8.025,0.275 8.05,0.275 8.242,0.467 R10.2@8.242,0.492
RADIO_S2: R11.2 U3.10 | length 4.6
  Top Layer w0.2: U3.10 7.244,-0.376 7.244,-0.031 7.65,0.375 7.65,1.891 8.034,2.275 8.05,2.275 8.25,2.475 R11.2
RADIO_S3: R12.2 U3.11 | length 5.7
  Top Layer w0.2: v1(7.55,-2.475) 7.582,-2.443 7.582,-2.15 8.007,-1.725 8.05,-1.725 8.232,-1.543 R12.2@8.232,-1.5
  Layer 2 w0.2: U3.11 7.45,0.17 7.45,-0.423 7.727,-0.7 7.727,-1.91 7.51,-2.128 7.51,-2.293 7.512,-2.295 7.512,-2.437 v1(7.55,-2.475)
RADIO_S4: R13.2 U3.12 | length 10.2
  Top Layer w0.2: v1(5.316,1.784) 5.316,1.805 6.32,2.809 6.32,3.78 U3.12 ; v1(7.55,-3.5) R13.2
  Layer 2 w0.2: v1(5.316,1.784) 5.316,1.771 5.112,1.567 5.112,0.794 5.706,0.2 6.365,0.2 7.4,-0.835 7.4,-1.775 7.05,-2.125 7.05,-2.998 7.109,-3.057 7.113,-3.061 cw(c6.45,-3.81) 7.21,-3.16 7.215,-3.165 v1(7.55,-3.5)
SPARE_1: U4.11 U5.11 | length 1.7
  Top Layer w0.2: U4.11 15.75,3.2 16.05,3.5 U5.11@16.05,4.1
SPARE_2: U4.12 U5.12 | length 1.8
  Top Layer w0.2: U4.12 15.25,3.3 15.4,3.45 U5.12
SPARE_3: U4.14 U5.14 | length 1.4
  Top Layer w0.2: U5.14@13.8,3.75 13.8,3.475 14.234,3.041 U4.14@14.234,2.516
SPARE_4: U4.15 U5.15 | length 2.3
  Top Layer w0.2: U5.15 13.008,4.242 13.008,3.467 13.275,3.2 13.613,3.2 13.753,3.06 13.753,2.503 U4.15
SPARE_5: U4.27 U5.27 | length 1.9
  Top Layer w0.2: U5.27 13.95,-4.1 13.95,-3.5 14.25,-3.2 U4.27
SPARE_6: U4.28 U5.28 | length 1.8
  Top Layer w0.2: U5.28 14.6,-3.45 14.75,-3.3 U4.28
SPARE_7: U4.29 U5.29 | length 1.8
  Top Layer w0.2: U4.29 15.25,-3.3 15.4,-3.45 U5.29
SPARE_8: U4.2 U5.2 | length 1.8
  Top Layer w0.2: U4.2@17.55,-1.3 18.007,-1.3 18.557,-1.85 U5.2@19.1,-1.85
SPARE_9: U4.3 U5.3 | length 1.7
  Top Layer w0.2: U4.3 17.506,-0.744 18.062,-0.744 18.368,-1.05 U5.3@19.1,-1.05
SWCLK: TP4.1 U4.24 U5.24 | length 8.1
  Top Layer w0.2: U5.24 10.769,-2.781 v1@11.769,-2.781 ; v1@11.788,-2.762 12.058,-2.762 12.5,-2.32 U4.24
  Layer 2 w0.2: v1(11.775,-2.781) 17.369,-2.781 v1(17.4,-2.75)
SWDIO: TP3.1 U4.23 U5.23 | length 11.4
  Top Layer w0.2: U5.23 11.604,-2 11.75,-1.854 v1(11.75,-1.429) ; v1@11.775,-1.438 11.795,-1.438 11.959,-1.274 12.476,-1.274 U4.23
  Layer 2 w0.2: v1(11.75,-1.429) 11.75,-2 12.204,-2.454 16.989,-2.454 17.193,-2.25 18.553,-2.25 18.875,-2.572 18.875,-3.275 18.628,-3.522 v1(18.623,-3.522)
VCC: C1.2 C3.2 C5.2 C11.2 C18.2 C20.2 Q1.1 Q1.2 Q1.3 R7.1 U1.4 U2.4 U2.6 U6.1 U7.1 | length 38
  Top Layer w0.2: R7.1@8.025,4.725 R7.1@8.05,4.725
  Top Layer w0.3: C11.2 0.325,-0.8 C1.2 C3.2 ; U1.4 2.225,-0.75 C3.2 ; C5.2 C3.2
  Top Layer w0.5: v1(5.163,4.875) 5.723,4.875 5.858,5.01 6.847,5.01 6.982,4.875 v1(7.625,4.875) 7.9,4.875 8.05,4.725 8.25,4.525 R7.1
  Top Layer w0.6: C18.2 24.566,-3.175 24.731,-3.34 25.352,-3.34 25.8,-2.892 25.8,-2.158 25.376,-1.734 25.376,-0.549 25.825,-0.1 25.825,0.133 24.508,1.45 C20.2
  Layer 2 w0.5: 7.841,5.023 16.027,5.023
  Layer 2 w0.6: 16.027,5.023 19.621,1.429 20.741,1.429 20.745,1.425 20.775,1.425 21.25,0.95 25.008,0.95 25.825,0.133 v1@25.825,0
  Bottom Layer w0.5: v1(5.163,4.875) 5.723,4.875 5.858,5.01 6.847,5.01 6.982,4.875 v1(7.625,4.875)
  other v1: 25,0 25.5,0 26,0 26.5,0 27,0 27.5,0 -1.1,0.175 -0.575,0.175 -0.025,0.175 0.475,0.175 -0.85,0.625 -0.3,0.625 0.25,0.625
pads on no net: U1.5 U2.5 U4.16 U4.32

## Polygon pours and split planes (outlines as drawn)
+5V on Bottom Layer "NONET_L-01_P-001" (solid, remove dead copper, pour order 46): 0.594,2.169 1.9,2.169 1.9,0.4 0.594,0.4
GND on Bottom Layer "NONET_L-01_P-001" (solid, remove dead copper, pour order 50): -4.5,5.5 23.5,5.5 23.5,-5.5 -4.5,-5.5
NetJ1_1 on Bottom Layer "NONET_L-01_P-001" (solid, remove dead copper, pour order 44): -4.5,-5.5 -0.075,-5.5 -0.1,-5.475 -0.1,-1.175 -4.5,-1.175
GND on Layer 1 "NONET_L-01_P-001" (solid, remove dead copper, pour order 48): -4.5,5.5 28,5.5 28,-5.5 -4.5,-5.5
VCC on Top Layer "NONET_L-01_P-001" (solid, remove dead copper, pour order 51): 28,2.995 23.125,2.995 23.25,2.869 23.25,-4.175 28,-4.175
NetJ1_1 on Top Layer "NONET_L-01_P-001" (solid, remove dead copper, pour order 43): -4.5,-5.5 -0.075,-5.5 -0.1,-5.475 -0.1,-1.175 -4.5,-1.175
VCC on Top Layer "NONET_L-01_P-001" (solid, remove dead copper, pour order 42): -2.9,0.87 -2.9,0.125 -4.5,0.125 -4.5,-1.875 -0.275,-1.875 -0.275,-1.3 4.275,-1.3 4.275,0.87
+3V3 on Top Layer "NONET_L-01_P-001" (solid, remove dead copper, pour order 40): -1.95,4.05 -1.95,2.05 -3.025,2.05 -3.05,2.025 -3.05,0.075 -4.5,0.075 -4.5,4.05
+5V on Top Layer "NONET_L-01_P-001" (solid, remove dead copper, pour order 41): 2.775,4.05 2.775,2.05 1.7,2.05 1.675,2.025 1.675,0.6 0.725,0.6 0.725,4.05
GND on Top Layer "NONET_L-01_P-001" (solid, remove dead copper, pour order 45): 28,5.537 28,-5.463 -4.5,-5.463 -4.5,5.537
GND on Layer 2 "NONET_L-01_P-001" (solid, remove dead copper, pour order 52): -4.5,5.5 28,5.5 28,-5.5 -4.5,-5.5
VCC on Layer 2 "NONET_L-01_P-001" (solid, remove dead copper, pour order 49): 22.45,3.975 22.587,2.187 23.025,1.75 28,1.725 28,-1.209 27.959,-1.25 25.925,-1.25 25.925,-4.5 19.45,-4.5 19.281,-4.331 19.281,-2.769 11.787,-2.769 11.775,-2.781 11.775,2 4.475,2 4.475,-1.3 -1.45,-1.3 -1.45,5.5 20.272,5.5

## Keep-outs
Keep-Out Layer:
  the board outline again, w0.1

## Other copper
Top Layer:
  rectangle net VCC: 23.7,1.575 24.2,2.625
  rectangle net VCC: 23.7,-3.05 24.2,-2
Layer 1:
  rectangle net +3V3: -4.245,0.281 -2.95,1.8

## Silkscreen, mask and mechanical layers (free items; w line width, h text height)
Top Overlay:
  lines w0.15: 25,-5 25,5
  lines w0.2: 7.715,-2.775 7.715,-2.275 ; 7.715,-0.765 7.715,-0.265 ; 7.724,3.262 7.724,3.762 ; 7.725,1.225 7.725,1.725
Bottom Overlay:
  text "THE / BRAINS / v2.4" at 5.638,7.098 h1 r90
  text "M2-" at 23.1,3.36 h0.9
  text "G" at 12.3,2.55 h0.9
  text "G" at 16.4,2.55 h0.9
  text "M2+" at 23.1,0.82 h0.9
  text "GND" at -1,0.35 h0.9
  text "5" at 12.3,-0.45 h0.9
  text "5" at 16.4,-0.45 h0.9
  text "VCC" at -1,-1.25 h0.9
  text "M1-" at 23.025,-1.72 h0.9
  text "S1" at 12.6,-3.45 h0.9
  text "S2" at 16.85,-3.45 h0.9
  text "M1+" at 23.025,-4.26 h0.9
Top Paste:
  rectangle: -3.5,-4.15 -0.9,-2.568
Top Solder:
  rectangle: -3.7,-4.382 -0.7,-2.4
  region: 21.85,-0.375 21.85,-2.225 22.275,-2.225 22.275,-2.2 23.75,-2.2 24.15,-2.2 24.15,-0.375 23.75,-0.375 23.75,-0.4 22.25,-0.4 22.25,-0.375
  region: 21.85,4.25 21.85,2.4 22.275,2.4 22.275,2.425 23.75,2.425 24.15,2.425 24.15,4.25 23.75,4.25 23.75,4.225 22.25,4.225 22.25,4.25
  region: -3.425,-4.7 -0.975,-4.7 -0.975,-4.35 -3.425,-4.35
  region: -1.3,0 -2.7,0 -2.7,2.75 -1.3,2.75
  region: 3.425,0 2.025,0 2.025,2.75 3.425,2.75
  region: 12.15,1.95 13.05,1.95 13.05,2.875 16.95,2.875 16.95,1.95 17.85,1.95 17.85,-1.95 16.95,-1.95 16.95,-2.85 13.05,-2.85 13.05,-1.95 12.15,-1.95
Misc:
  lines w0.1: 0,-5.5 0,-2.54 5.08,-2.54 5.08,5.5 ; 7.62,-5.5 7.62,5.5
Sheet Format, Top:
  drawing of 836 lines, arcs and shapes, not listed
  text "1" at -61.607,100.745 h1.85
  text "2" at -12.023,100.745 h1.85
  text "3" at 37.977,100.745 h1.85
  text "4" at 87.977,100.745 h1.85
  text "5" at 137.977,100.745 h1.85
  text "6" at 187.977,100.745 h1.85
  text "7" at 237.977,100.745 h1.85
  text "8" at 287.977,100.745 h1.85
  text "A" at -89.523,84.745 h1.85
  text "A" at 315.477,84.745 h1.85
  text "B" at -89.523,34.745 h1.85
  text "B" at 315.477,34.745 h1.85
  text "C" at -89.523,-15.255 h1.85
  text "C" at 315.477,-15.255 h1.85
  text "D" at -89.523,-65.255 h1.85
  text "D" at 315.477,-65.255 h1.85
  text "E" at -89.523,-115.255 h1.85
  text "E" at 315.477,-115.255 h1.85
  text ".VariantName" at 256.66,-145.804 h2.54
  text "Project" at 195.7,-146.002 h2.54
  text "Variant" at 249.04,-146.002 h2.54
  text ".Project_Description" at 204.59,-146.876 h3.5
  text ".Project_Revision" at 256.66,-152.154 h2.54
  text "Sheet" at 195.7,-152.352 h2.54
  text "Revision" at 249.04,-152.352 h2.54
  text ".Printout_Name" at 204.59,-153.226 h3.5
  text "Design" at 195.7,-157.432 h2.54
  text ".Project_DesignBy" at 207.13,-157.432 h2.54
  text "Checking" at 233.8,-157.432 h2.54
  text ".Project_CheckingBy" at 245.23,-157.432 h2.54
  text "Drafting" at 195.7,-159.972 h2.54
  text ".Project_DraftingBy" at 207.13,-159.972 h2.54
  text "Components" at 233.8,-159.972 h2.54
  text ".Project_ComponentsBy" at 245.23,-159.972 h2.54
  text "Layout" at 195.7,-162.512 h2.54
  text ".Project_LayoutBy" at 207.13,-162.512 h2.54
  text ".Project_Address1" at 273.17,-162.512 h2.54
  text ".Project_Phone" at 295.869,-162.54 h2.54
  text ".Project_Address2" at 273.17,-165.052 h2.54
  text ".Project_Fax" at 295.869,-165.115 h2.54
  text "F" at -89.523,-165.255 h1.85
  text "F" at 315.477,-165.255 h1.85
  text "A3" at 245.23,-166.124 h2.54
  text "Routing" at 195.7,-166.322 h2.54
  text "MECHANICAL LAYER 2" at 207.13,-166.322 h2.54
  text "Size" at 233.8,-166.322 h2.54
  text ".Project_Address3" at 273.17,-167.592 h2.54
  text ".Project_Address4" at 273.17,-170.132 h2.54
  text "Date" at 195.7,-171.402 h2.54
  text ".Print_Date" at 207.13,-171.402 h2.54
  text "Time" at 233.8,-171.402 h2.54
  text ".Print_Time" at 245.23,-171.402 h2.54
  text ".Project_Address5" at 273.17,-172.672 h2.54
  text ".Project_URL" at 273.17,-175.212 h2.54
  text "File" at 195.7,-176.482 h2.54
  text ".Pcb_File_Name" at 207.13,-176.482 h2.54
  text "1" at -61.607,-181.255 h1.85
  text "2" at -12.023,-181.255 h1.85
  text "3" at 37.977,-181.255 h1.85
  text "4" at 87.977,-181.255 h1.85
  text "5" at 137.977,-181.255 h1.85
  text "6" at 187.977,-181.255 h1.85
  text "7" at 237.977,-181.255 h1.85
  text "8" at 287.977,-181.255 h1.85